# EAGLE board bottom_V3 Fillet v19 (EAGLE 9.7.0)
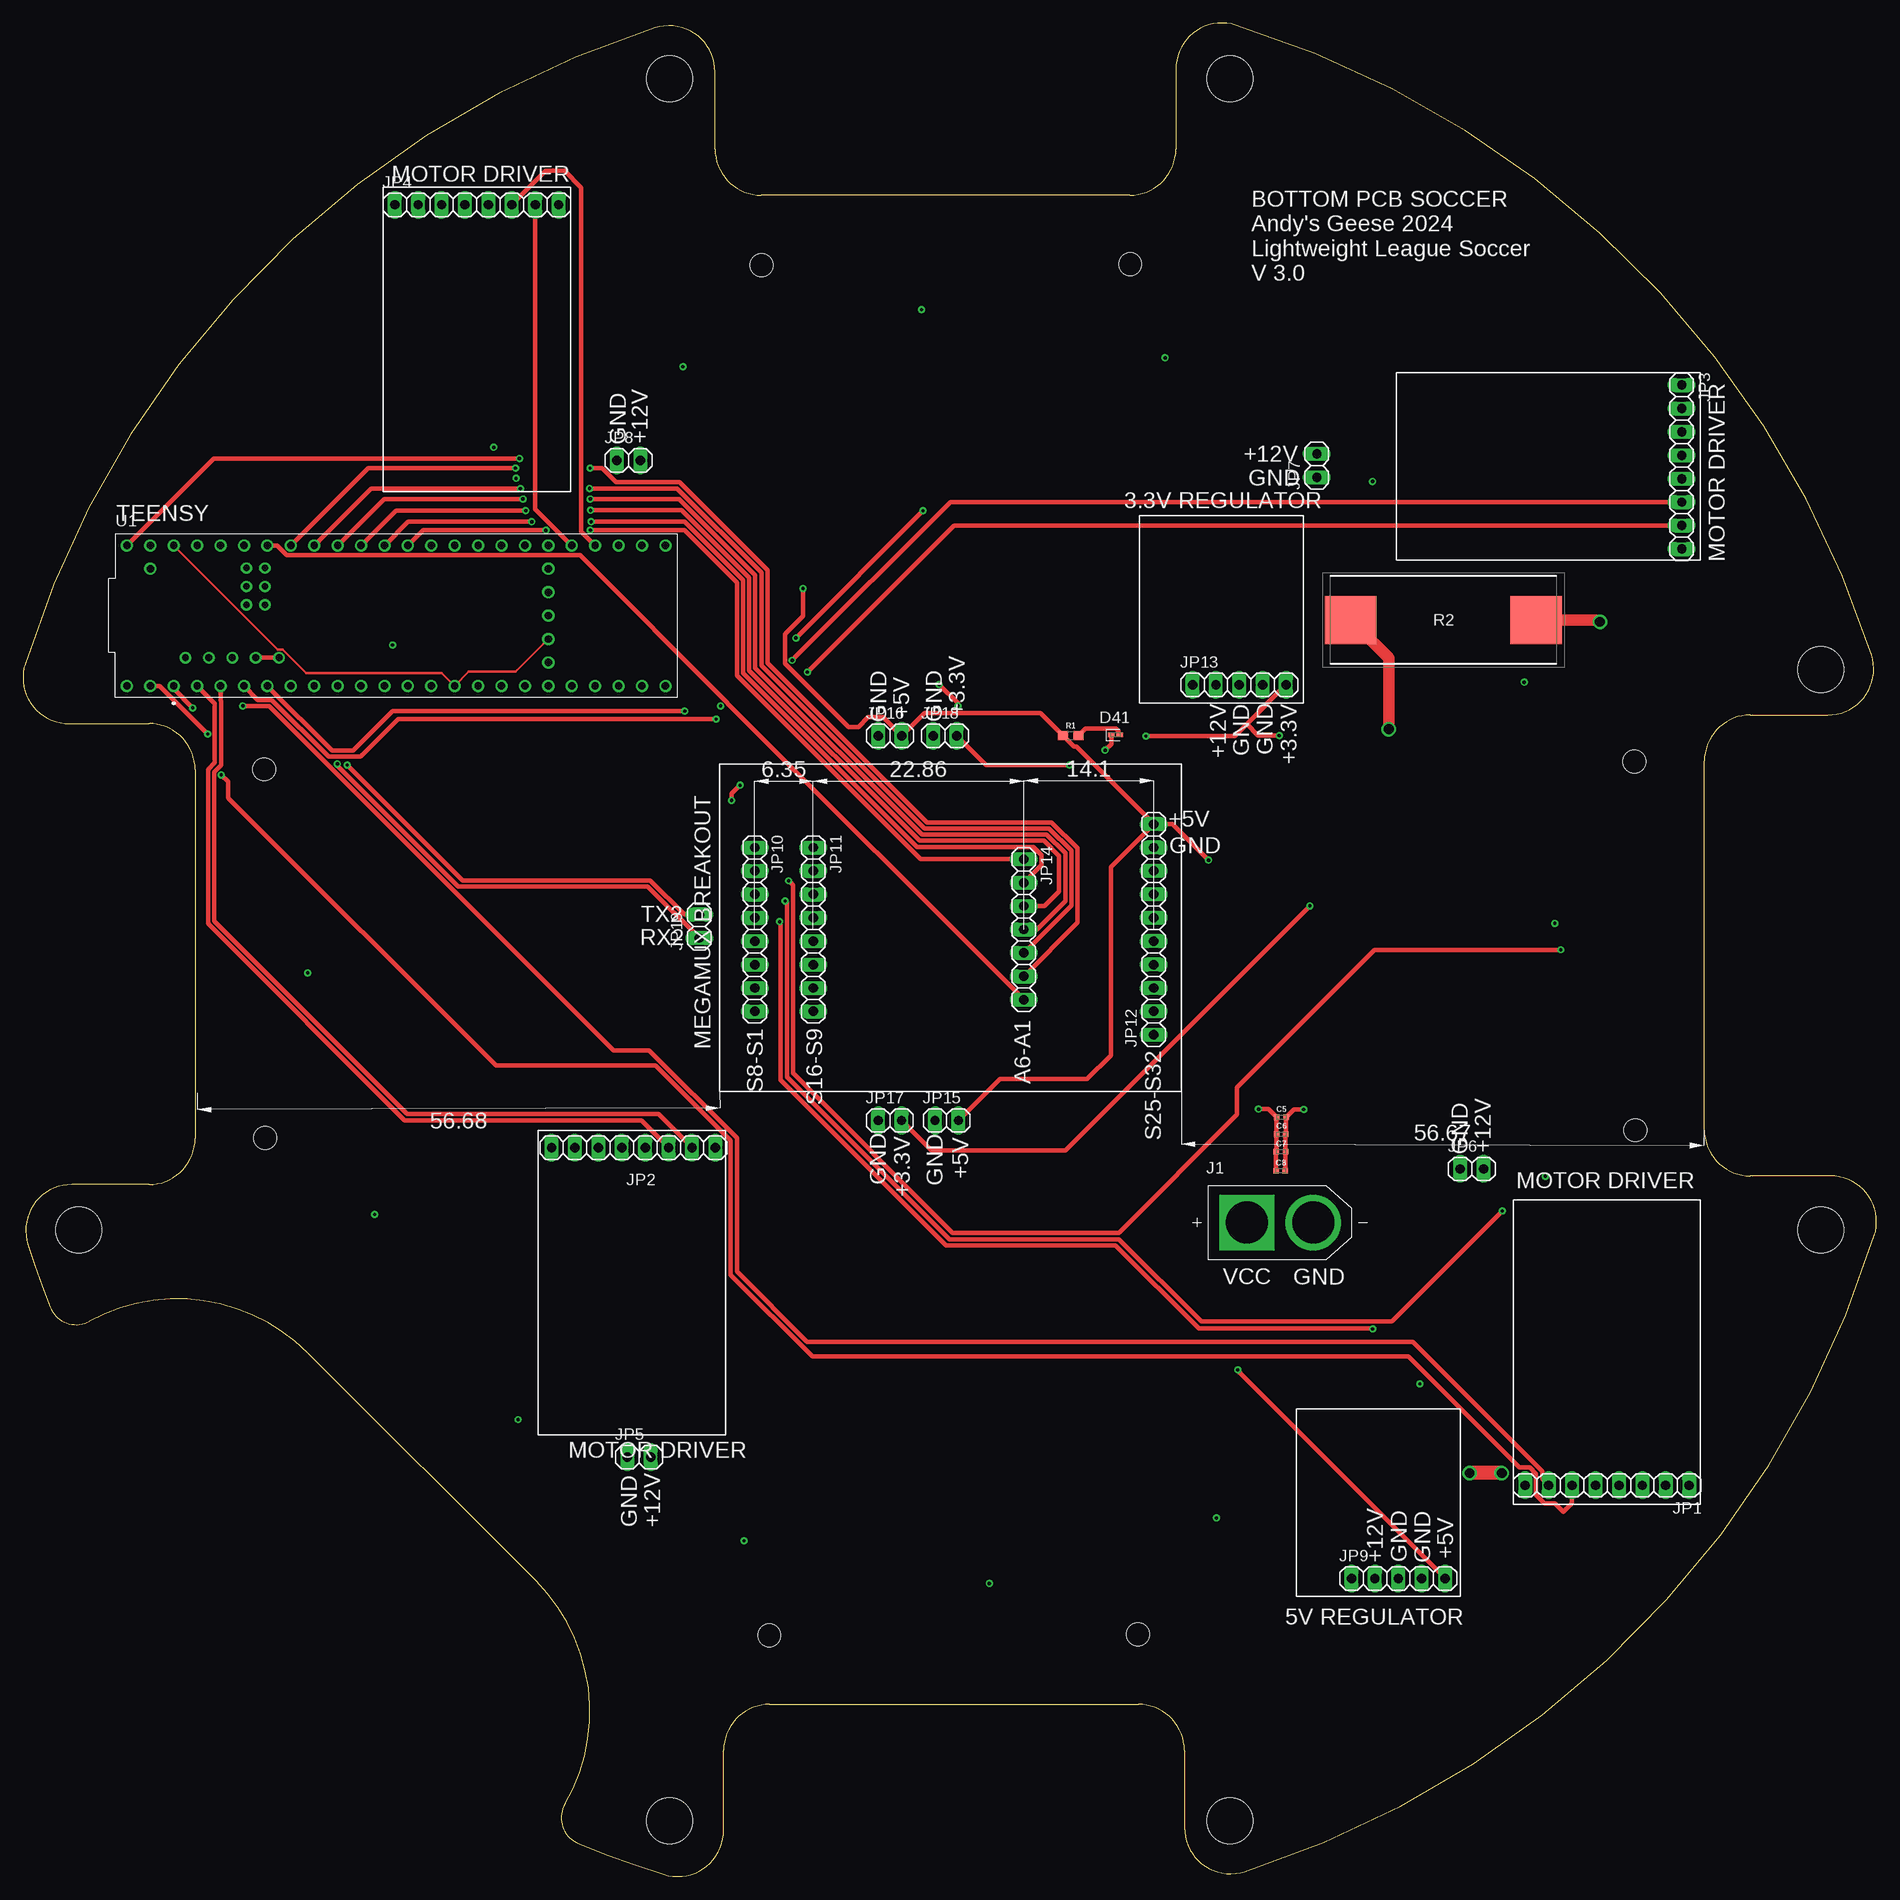
[diagram p0: board, top side]
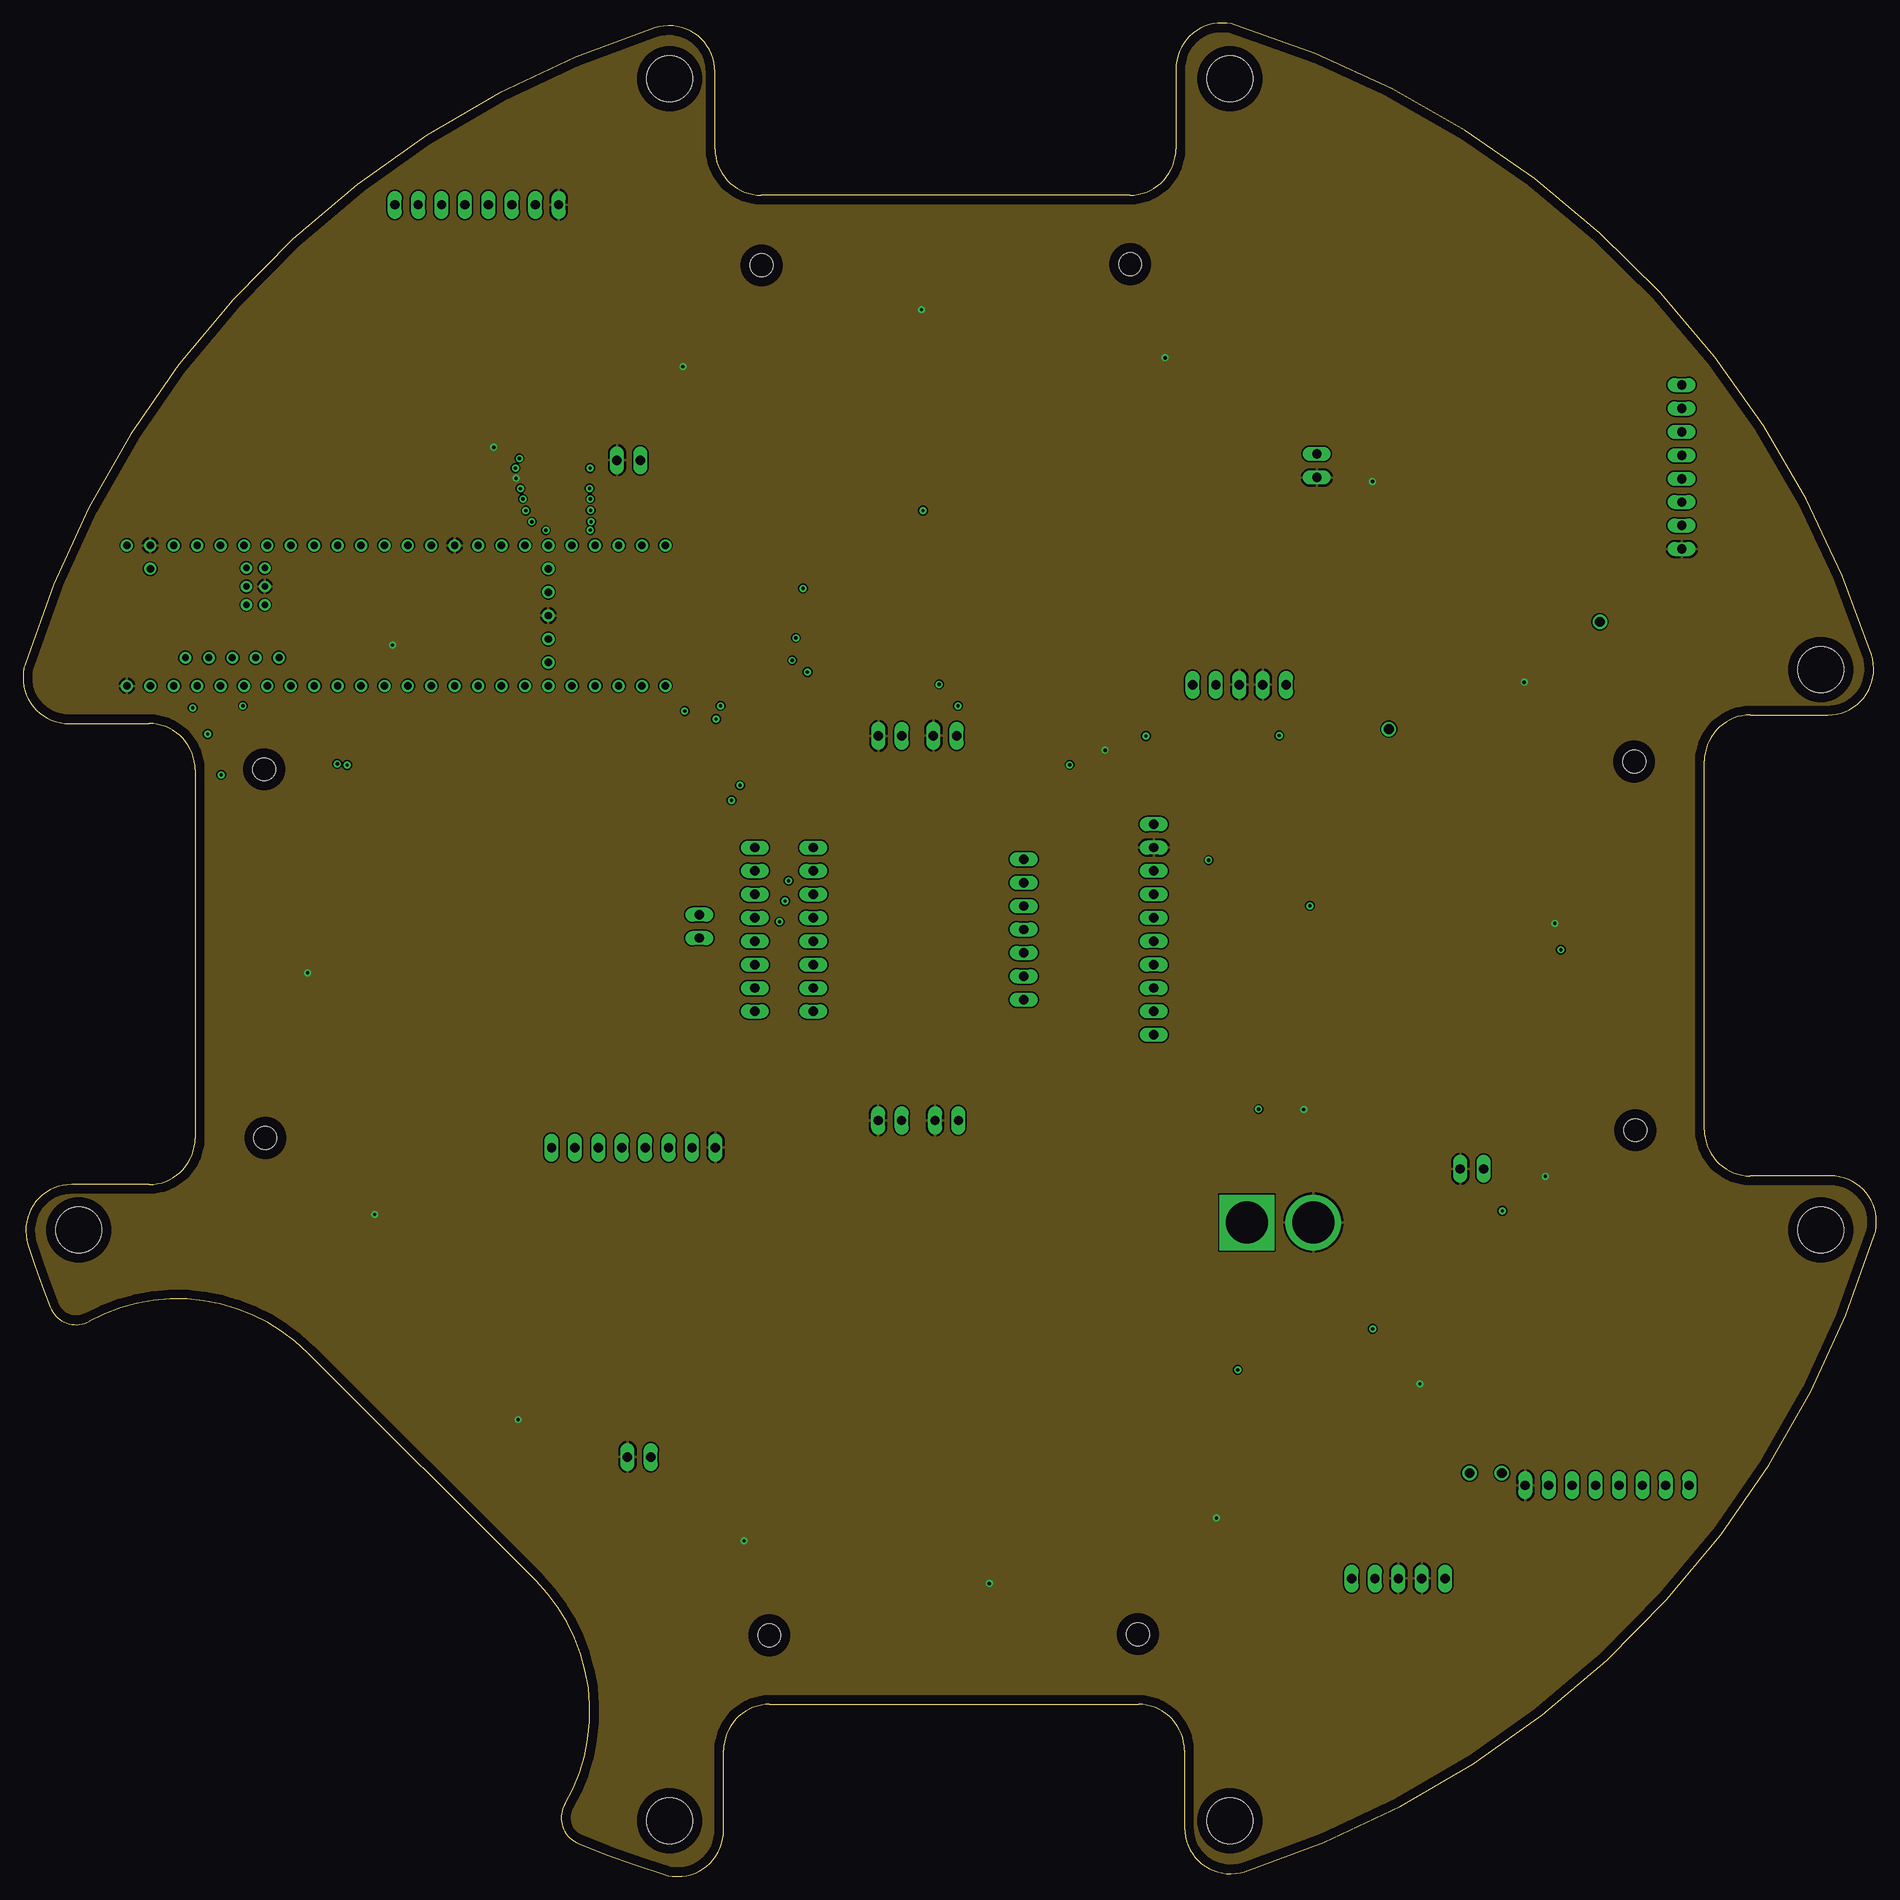
[diagram p1: board, inner layer Route2]
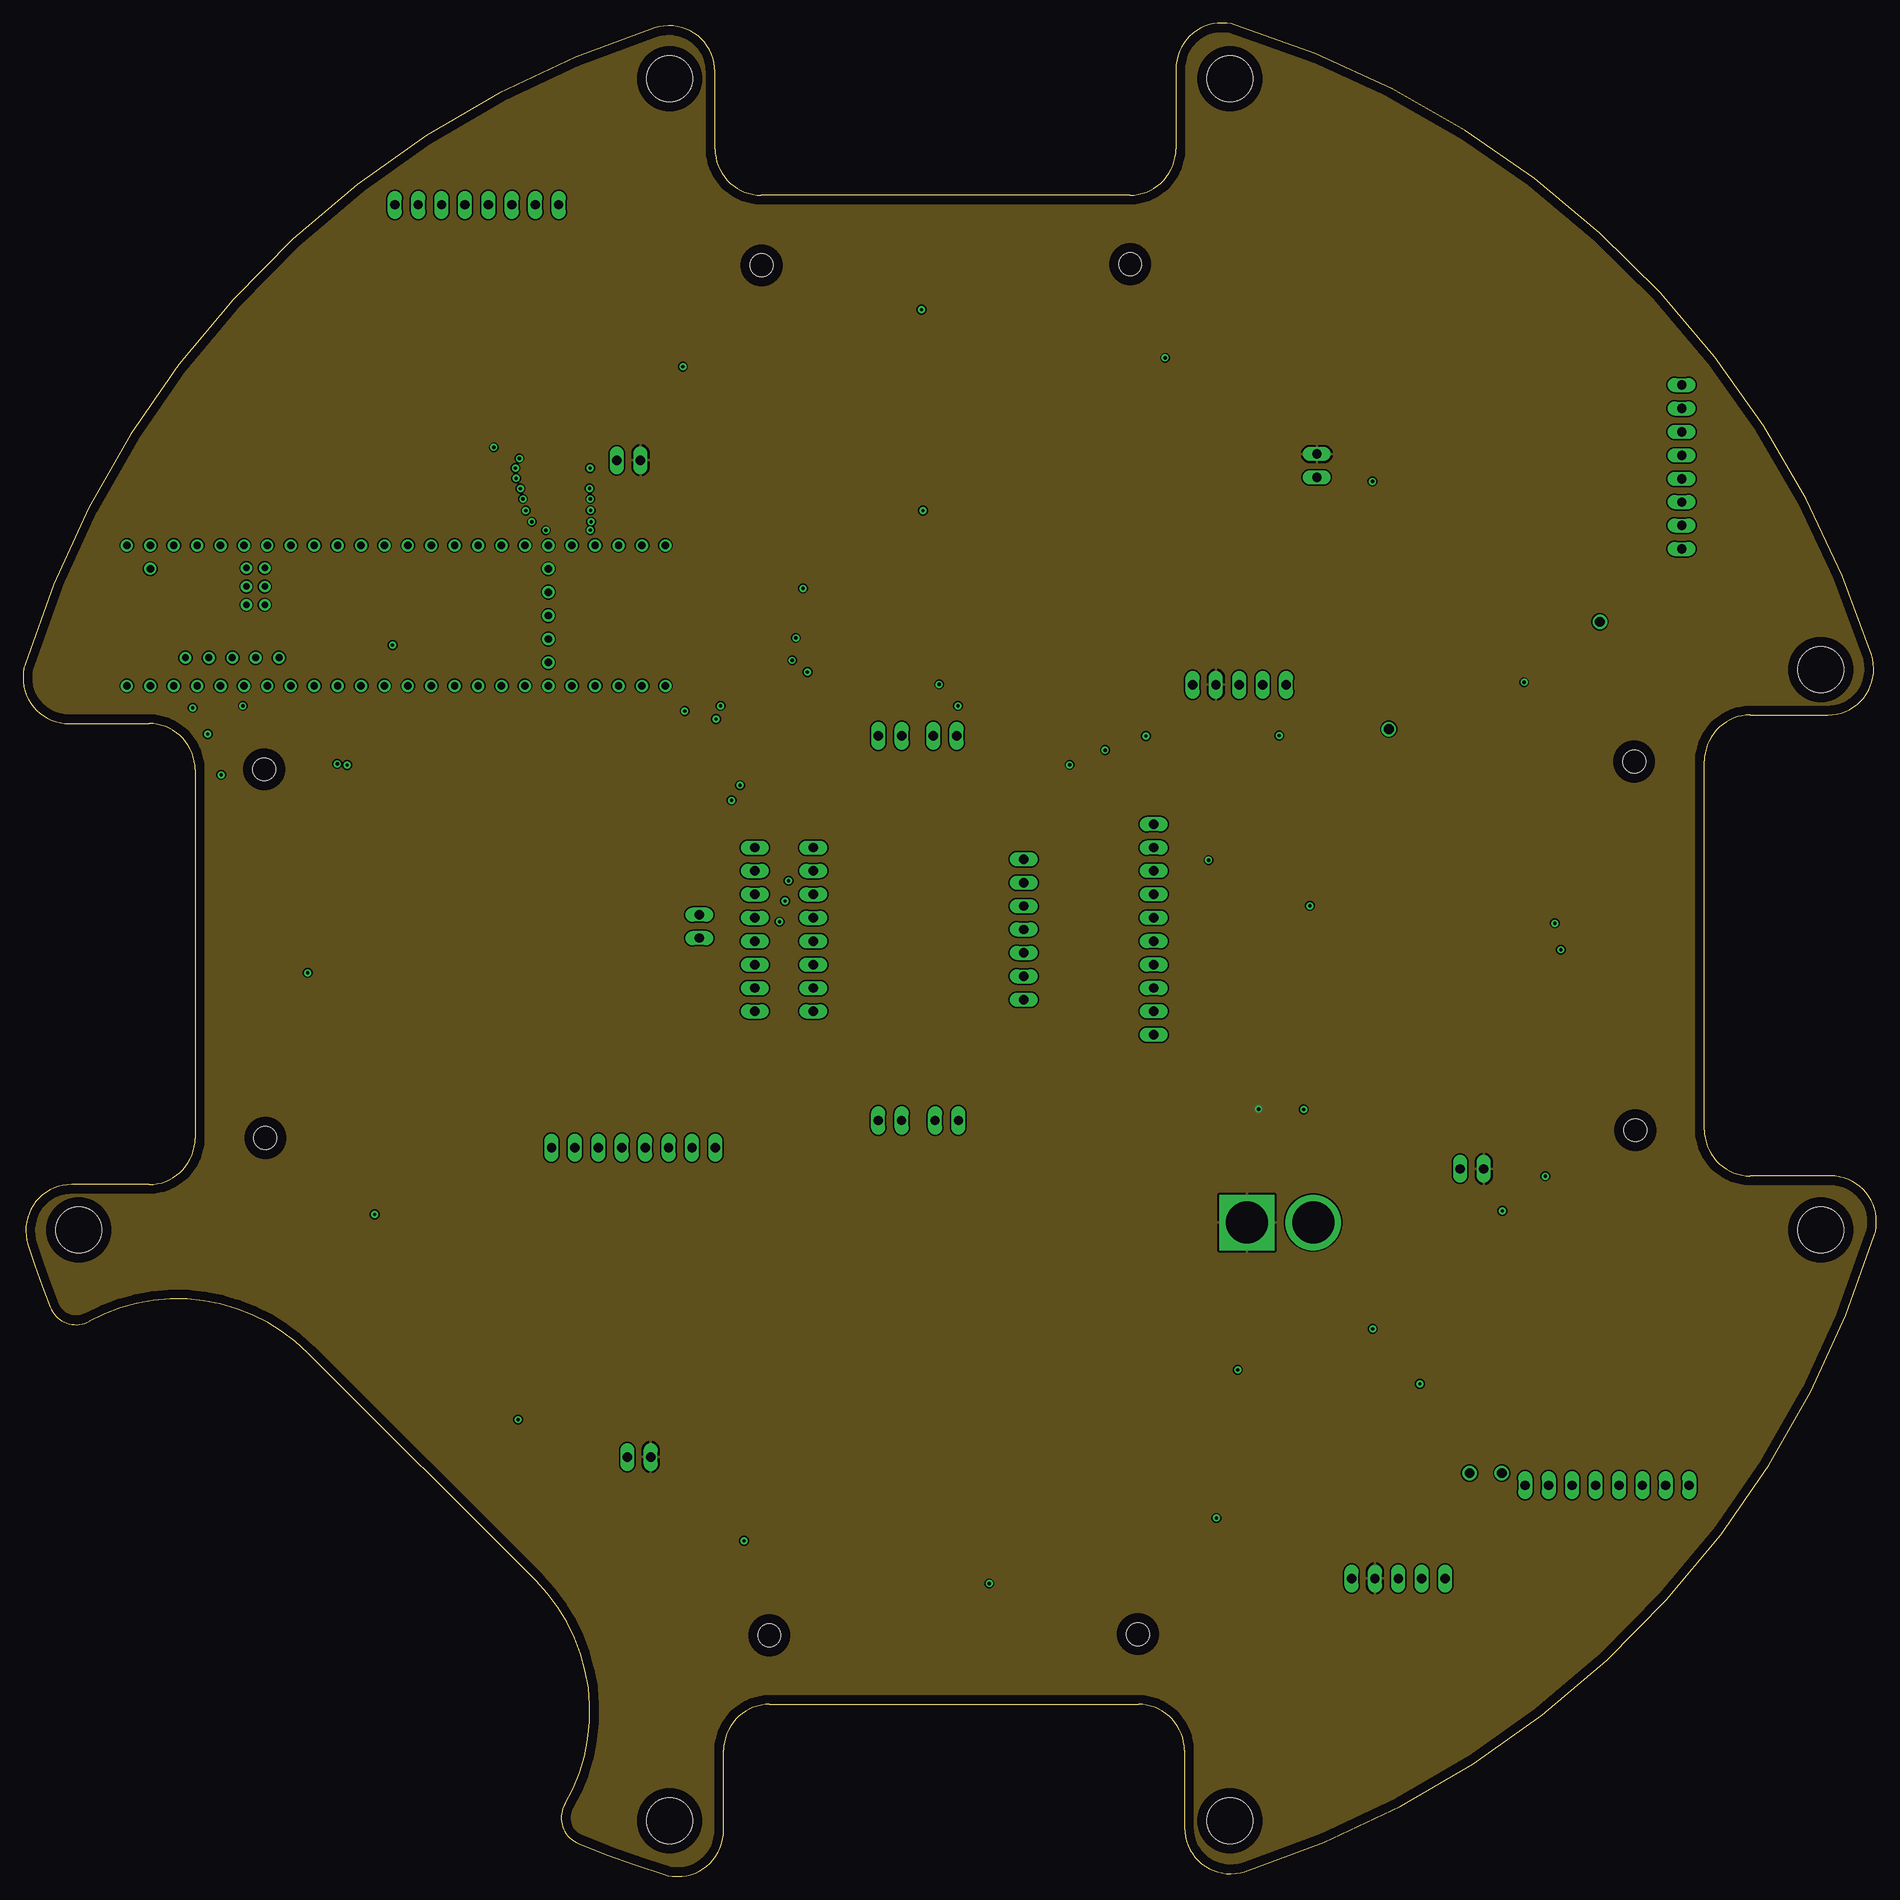
[diagram p2: board, inner layer Route15]
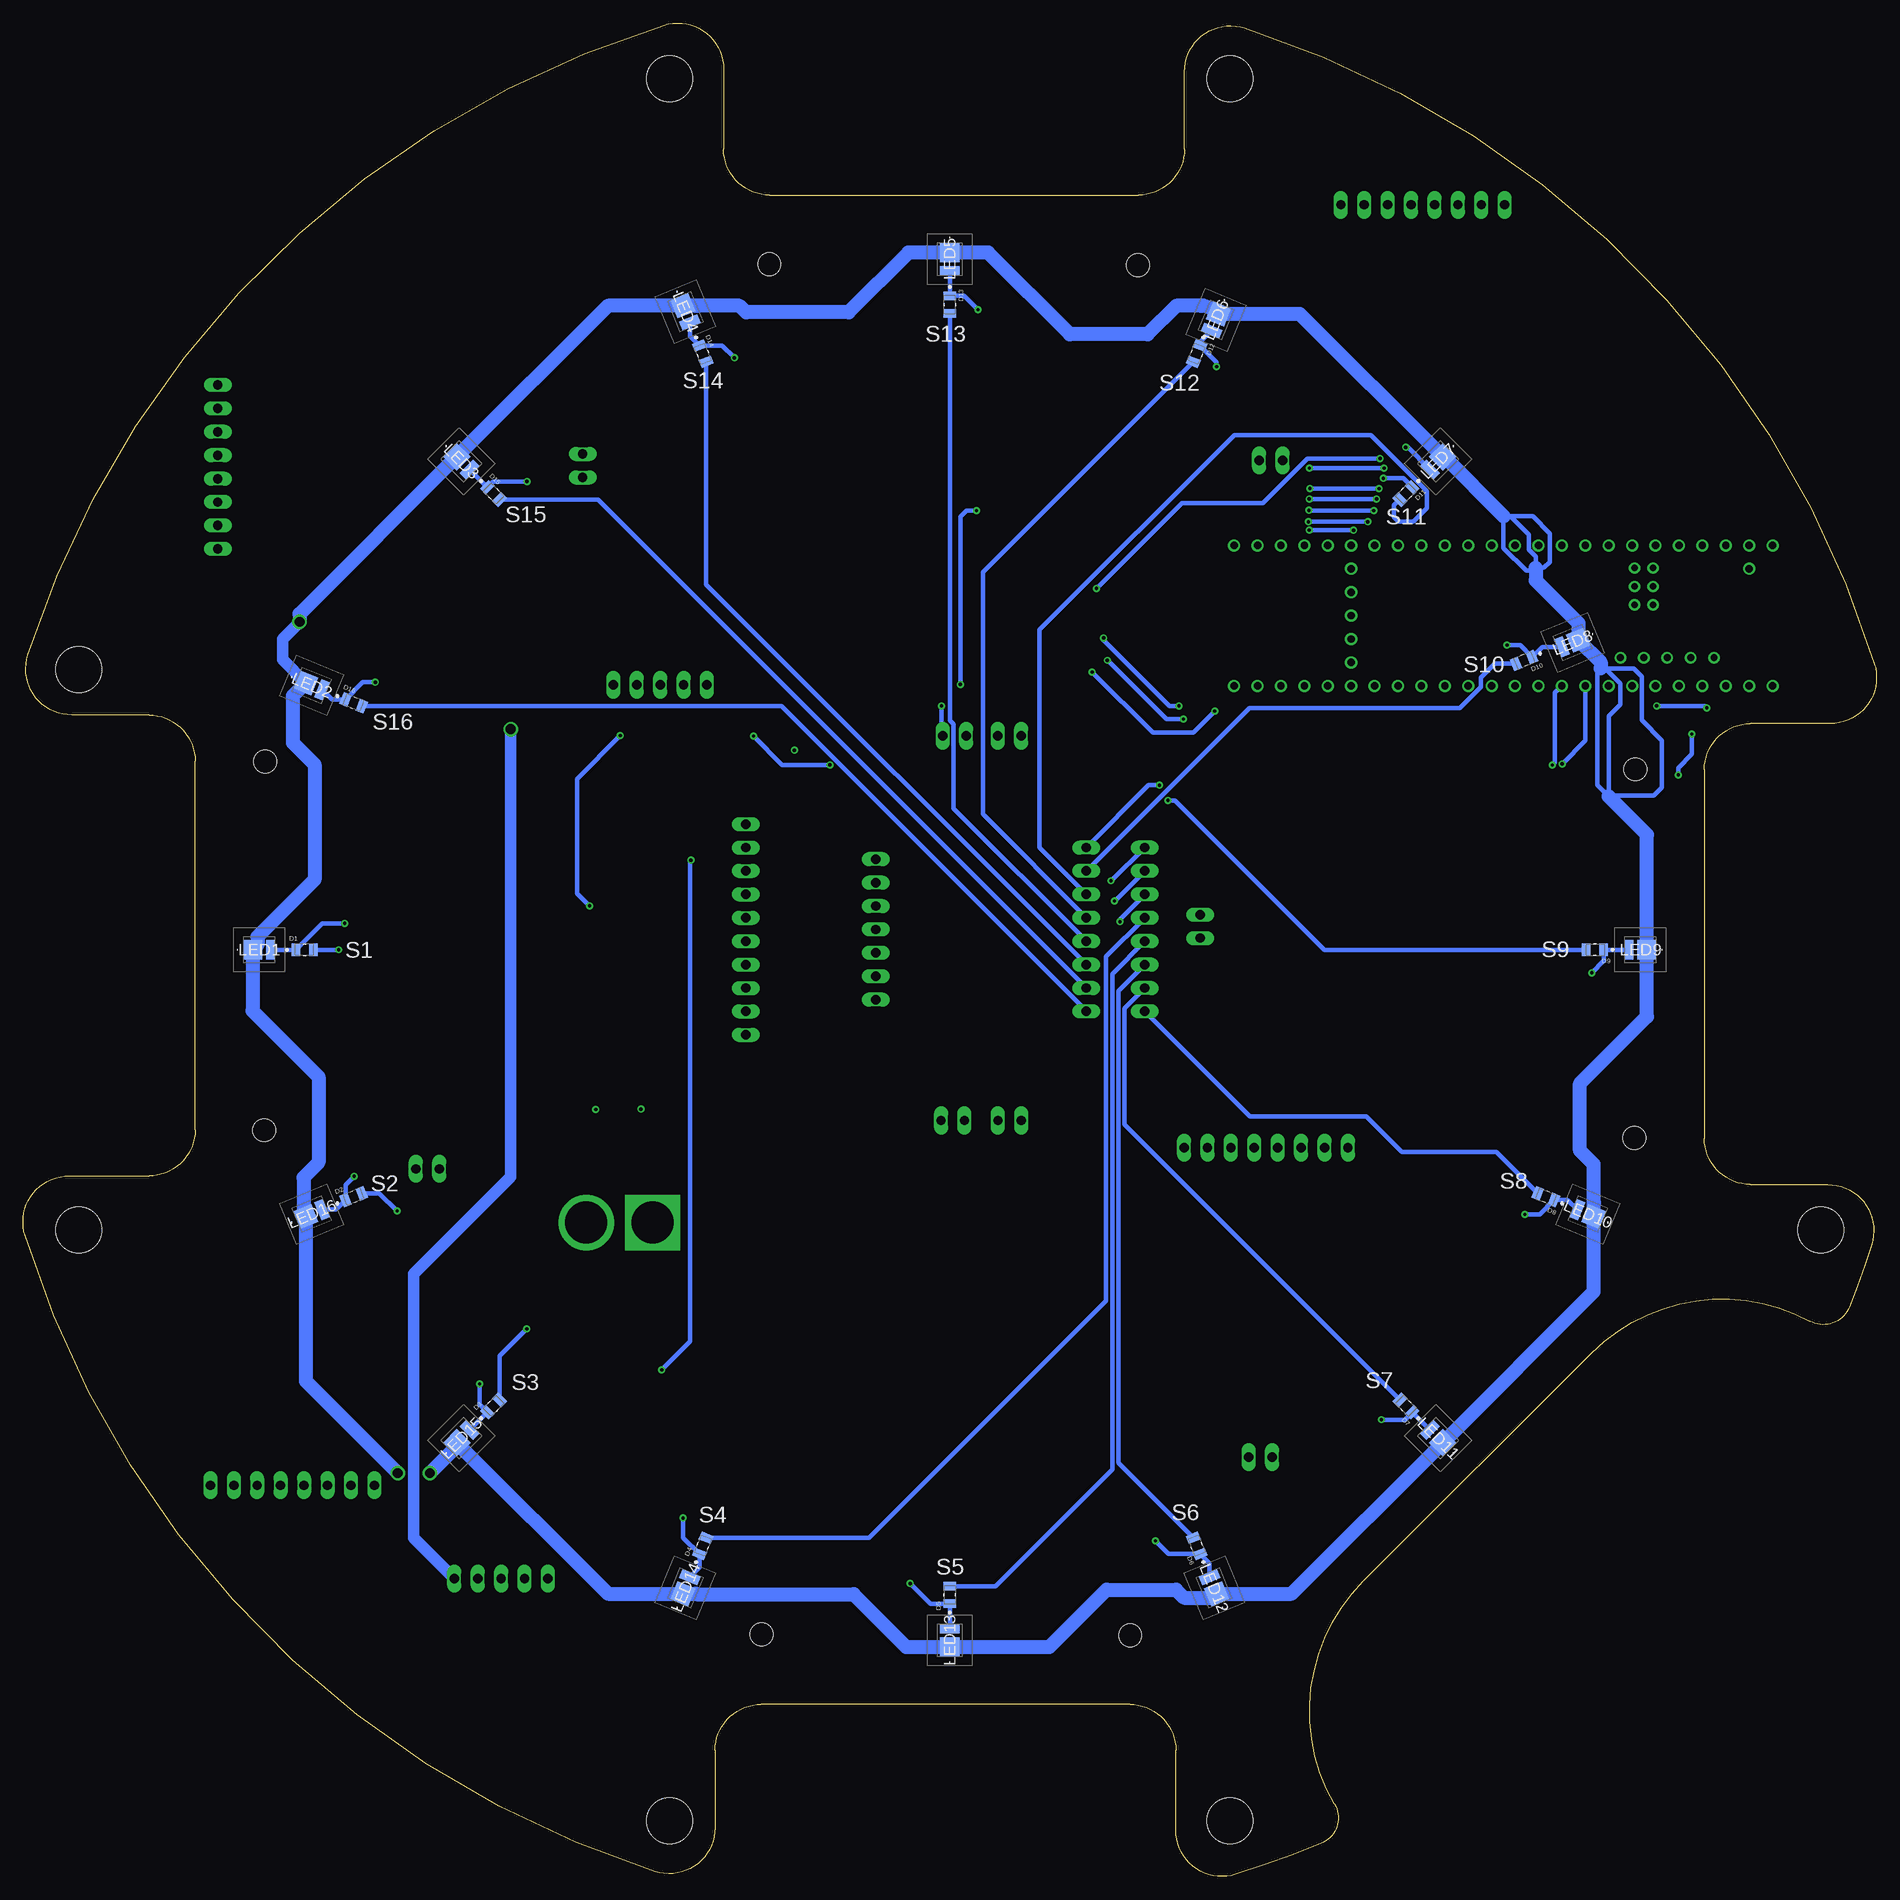
[diagram p3: board, bottom side, seen from below]

Size 201.08 x 201.08 mm. Coordinates in mm from the lower left corner, seen from the top.
Outline: 30.89,56.8 55.64,32.05 arc-75 58.79,7.86 arc98 60.23,3.58 arc5 69.53,0.22 arc107 76,5 76,13.67 arc-90 81,18.67 121,18.67 arc-90 126,13.67 126,5.29 arc108 132.53,0.53 arc55 200.85,69.53 arc107 196.08,76 187.4,76 arc-90 182.4,81 182.4,121 arc-90 187.4,126 195.79,126 arc108 200.55,132.53 arc55 131.55,200.85 arc107 125.07,196.08 125.07,187.4 arc-90 120.07,182.4 80.07,182.4 arc-90 75.07,187.4 75.07,195.79 arc108 68.55,200.55 arc55 0.22,131.55 arc107 5,125.07 13.67,125.07 arc-90 18.67,120.07 18.67,80.07 arc-90 13.67,75.07 5.29,75.07 arc108 0.53,68.55 arc4 2.97,61.75 arc97 7.19,60.22 arc-74 30.89,56.8
Copper layers (1+2*15+16): Top 0.035mm / dielectric 1.5mm / Route2 0.035mm / dielectric 0.15mm / Route15 0.035mm / dielectric 0.2mm / Bottom 0.035mm
Design rules "default *": minimum track width 6mil, minimum drill 0.35mm, track to track 6mil, track to pad 6mil, pad to pad 6mil, via to via 6mil, smd to smd 6mil, copper to edge 40mil, drill to drill 6mil, minimum pad ring 10mil, minimum via ring 8mil, stop-mask expansion 4mil, vias tented up to drill 0mil, thermal gap 10mil
Holes 2.5 mm at 80.12,174.79 80.96,26.17 174.79,120.96 26.17,120.12 120.12,174.9 120.96,26.29 174.9,80.96 26.29,80.12
Holes 5 mm at 195.02,70.16 130.92,6.06 6.06,70.16 70.16,6.06 195.02,130.92 130.92,195.02 70.16,195.02

## Footprints (pad centres in the part's own frame; a part is rotated, then mirrored left to right if it is on the bottom)
0402-TIGHT = smd 0.6 x 0.6: 1 -0.5,0; 2 0.5,0
DIOC2012X80N = smd 0.91 x 1.36: A 0.95,0; K -0.95,0
LEDC1005X25N_FLAT-G = smd 0.7 x 0.5: A 0.45,0; C -0.45,0
AMASS_XT60-M = drill 4.55 pad 6: N 3.6,0 | drill 4.55 pad 6 square: P -3.6,0
1X08 = drill 1.016 long: 1 -8.89,0; 2 -6.35,0; 3 -3.81,0; 4 -1.27,0; 5 1.27,0; 6 3.81,0; 7 6.35,0; 8 8.89,0
1X02 = drill 1.016 long: 1 -1.27,0; 2 1.27,0
1X05 = drill 1.016 long: 1 -5.08,0; 2 -2.54,0; 3 0,0; 4 2.54,0; 5 5.08,0
1X10 = drill 1.016 long: 1 -11.43,0; 2 -8.89,0; 3 -6.35,0; 4 -3.81,0; 5 -1.27,0; 6 1.27,0; 7 3.81,0; 8 6.35,0; 9 8.89,0; 10 11.43,0
1X07 = drill 1.016 long: 1 -7.62,0; 2 -5.08,0; 3 -2.54,0; 4 0,0; 5 2.54,0; 6 5.08,0; 7 7.62,0
150283HS73103 = smd 2.1 x 2.1: 1 -0.7,0 | smd 1 x 2.1: 2 1.25,0
0603 = smd 1.1 x 1: 1 -0.85,0; 2 0.85,0
RESM24595X990N = smd 5.6 x 5.2: 1 -10.05,0; 2 10.05,0
MODULE_DEV-16771 = drill 0.8: 0 -26.67,-7.62; 1 -24.13,-7.62; 2 -21.59,-7.62; 3 -19.05,-7.62; 3.3V_1 6.35,-7.62; 3.3V_2 -24.13,7.62; 3.3V_3 16.51,-2.54; 4 -16.51,-7.62; 5 -13.97,-7.62; 6 -11.43,-7.62; 7 -8.89,-7.62; 8 -6.35,-7.62; 9 -3.81,-7.62; 10 -1.27,-7.62; 11 1.27,-7.62; 12 3.81,-7.62; 13 3.81,7.62; 14 1.27,7.62; 15 -1.27,7.62; 16 -3.81,7.62; 17 -6.35,7.62; 18 -8.89,7.62; 19 -11.43,7.62; 20 -13.97,7.62; 21 -16.51,7.62; 22 -19.05,7.62; 23 -21.59,7.62; 24 8.89,-7.62; 25 11.43,-7.62; 26 13.97,-7.62; 27 16.51,-7.62; 28 19.05,-7.62; 29 21.59,-7.62; 30 24.13,-7.62; 31 26.67,-7.62; 32 29.21,-7.62; 33 29.21,7.62; 34 26.67,7.62; 35 24.13,7.62; 36 21.59,7.62; 37 19.05,7.62; 38 16.51,7.62; 39 13.97,7.62; 40 11.43,7.62; 41 8.89,7.62; GND1 -29.21,-7.62; GND2 6.35,7.62; GND3 -26.67,7.62; GND4 16.51,0; ON/OFF 16.51,5.08; PROGRAM 16.51,2.54; VBAT 16.51,-5.08; VIN -29.21,7.62; VUSB -26.67,5.08 | drill 0.75: 5V -22.86,-4.57; D+ -17.78,-4.57; D- -20.32,-4.57; USB_GND1 -15.24,-4.57; USB_GND2 -12.7,-4.57 | drill 0.7: GND5 -14.24,3.17; LED -16.24,3.17; R+ -16.24,5.17; R- -14.24,5.17; T+ -14.24,1.17; T- -16.24,1.17

## Placement (x,y rotation side)
C5  0.1uF  [0402-TIGHT]  136.52,82.36 0 top
C6  0.1uF  [0402-TIGHT]  136.5,80.54 0 top
C7  0.1uF  [0402-TIGHT]  136.47,78.62 0 top
C8  0.1uF  [0402-TIGHT]  136.45,76.55 0 top
D1  019-141-411-R  [DIOC2012X80N]  170.54,100.54 0 bottom
D2  019-141-411-R  [DIOC2012X80N]  165.21,73.75 22.5 bottom
D3  019-141-411-R  [DIOC2012X80N]  150.04,51.04 45 bottom
D4  019-141-411-R  [DIOC2012X80N]  127.33,35.87 67.5 bottom
D5  019-141-411-R  [DIOC2012X80N]  100.54,30.54 90 bottom
D6  019-141-411-R  [DIOC2012X80N]  73.75,35.87 112.5 bottom
D7  019-141-411-R  [DIOC2012X80N]  51.04,51.04 135 bottom
D8  019-141-411-R  [DIOC2012X80N]  35.87,73.75 157.5 bottom
D9  019-141-411-R  [DIOC2012X80N]  30.54,100.54 180 bottom
D10  019-141-411-R  [DIOC2012X80N]  38.24,131.93 202.5 bottom
D11  019-141-411-R  [DIOC2012X80N]  51.04,150.04 225 bottom
D12  019-141-411-R  [DIOC2012X80N]  73.75,165.21 247.5 bottom
D13  019-141-411-R  [DIOC2012X80N]  100.54,170.54 270 bottom
D14  019-141-411-R  [DIOC2012X80N]  127.33,165.21 292.5 bottom
D15  019-141-411-R  [DIOC2012X80N]  150.04,150.04 315 bottom
D16  019-141-411-R  [DIOC2012X80N]  165.21,127.33 337.5 bottom
D41  LED_GREEN  [LEDC1005X25N_FLAT-G]  118.51,123.85 0 top
J1  XT60-M  [AMASS_XT60-M]  136.37,70.94 0 top
JP1  PINHD-1X8  [1X08]  171.87,42.43 180 top
JP2  PINHD-1X8  [1X08]  66.23,79.07 0 top
JP3  PINHD-1X8  [1X08]  179.95,152.91 270 top
JP4  PINHD-1X8  [1X08]  49.22,181.36 0 top
JP5  PINHD-1X2  [1X02]  66.83,45.51 0 top
JP6  PINHD-1X2  [1X02]  157.19,76.76 0 top
JP7  PINHD-1X2  [1X02]  140.37,153.05 90 top
JP8  PINHD-1X2  [1X02]  65.7,153.64 0 top
JP9  PINHD-1X5  [1X05]  149.21,32.33 0 top
JP10  PINHD-1X8  [1X08]  79.37,102.74 270 top
JP11  PINHD-1X8  [1X08]  85.72,102.74 270 top
JP12  PINHD-1X10  [1X10]  122.67,102.74 90 top
JP13  PINHD-1X5  [1X05]  131.96,129.29 0 top
JP14  PINHD-1X7  [1X07]  108.58,102.74 270 top
JP15  PINHD-1X2  [1X02]  100.21,82.02 0 top
JP16  PINHD-1X2  [1X02]  94.06,123.74 0 top
JP17  PINHD-1X2  [1X02]  94.04,82.02 0 top
JP18  PINHD-1X2  [1X02]  100.02,123.75 0 top
JP19  PINHD-1X2  [1X02]  73.37,103.08 90 top
LED1  150283HS73103  [150283HS73103]  175.47,100.54 0 bottom
LED2  150283HS73103  [150283HS73103]  169.76,129.21 337.5 bottom
LED3  150283HS73103  [150283HS73103]  153.52,153.52 315 bottom
LED4  150283HS73103  [150283HS73103]  129.21,169.76 292.5 bottom
LED5  150283HS73103  [150283HS73103]  100.54,175.47 270 bottom
LED6  150283HS73103  [150283HS73103]  71.66,168.87 247.5 bottom
LED7  150283HS73103  [150283HS73103]  47.56,153.52 225 bottom
LED8  150283HS73103  [150283HS73103]  32.97,133.87 202.5 bottom
LED9  150283HS73103  [150283HS73103]  25.61,100.54 180 bottom
LED10  150283HS73103  [150283HS73103]  31.31,71.86 157.5 bottom
LED11  150283HS73103  [150283HS73103]  47.56,47.56 135 bottom
LED12  150283HS73103  [150283HS73103]  71.86,31.31 112.5 bottom
LED13  150283HS73103  [150283HS73103]  100.54,25.61 90 bottom
LED14  150283HS73103  [150283HS73103]  129.21,31.31 67.5 bottom
LED15  150283HS73103  [150283HS73103]  153.52,47.56 45 bottom
LED16  150283HS73103  [150283HS73103]  169.76,71.86 22.5 bottom
R1  1k  [0603]  113.66,123.77 0 top
R2  SMW71R5JT  [RESM24595X990N]  154.1,136.33 0 top
U1  DEV-16771  [MODULE_DEV-16771]  40.48,136.79 0 top

## Library data of the parts
C5-C8 = SparkFun-Capacitors; PROD_ID: CAP-12416
D1-D16 = 019-141-411-R; MANUFACTURER: Advanced Photonix; MAXIMUM_PACKAGE_HEIGHT: 0.8mm; PARTREV: Rev 5/7/2019; STANDARD: IPC 7351B
D41 = LED; CATEGORY: LED; COLOR: GREEN; DESCRIPTION: CHIP LED FLAT; SUB-CATEGORY: CHIP; TYPE: FLAT_TOP
J1 = XT60-M; AVAILABILITY: Not in stock; CHECK_PRICES: https://www.snapeda.com/parts/XT60-M/AMASS/view-part/?ref=eda; DESCRIPTION: Plug; DC supply; XT60; male; PIN: 2; for cable; soldered; 30A; 500V; MF: AMASS; MP: XT60-M; PACKAGE: Package; PRICE: None; SNAPEDA_LINK: https://www.snapeda.com/parts/XT60-M/AMASS/view-part/?ref=snap
JP1-JP4 JP10 JP11 = Connector; CATEGORY: Headers; DESCRIPTION: Header, Straight, 8 Position; MANUFACTURER: Generic; MPN: Generic; OPERATING_TEMPERATURE: Generic; PART_STATUS: Active; PITCH: 0.100" (2.54mm); ROHS_COMPLIANCE: Generic; SERIES: Generic; SUB-CATEGORY: Headers, Male Pins; TYPE: Board to Board or Cable, Unshrouded, Through Hole, Straight
JP5-JP8 JP15-JP19 = Connector; CATEGORY: Headers; DESCRIPTION: Header, Straight, 2 Position; MANUFACTURER: Generic; MPN: Generic; OPERATING_TEMPERATURE: Generic; PART_STATUS: Active; PITCH: 0.100" (2.54mm); ROHS_COMPLIANCE: Generic; SERIES: Generic; SUB-CATEGORY: Headers, Male Pins; TYPE: Board to Board or Cable, Unshrouded, Through Hole, Straight
JP9 JP13 = Connector; CATEGORY: Headers; DESCRIPTION: Header, Straight, 5 Position; MANUFACTURER: Generic; MPN: Generic; OPERATING_TEMPERATURE: Generic; PART_STATUS: Active; PITCH: 0.100" (2.54mm); ROHS_COMPLIANCE: Generic; SERIES: Generic; SUB-CATEGORY: Headers, Male Pins; TYPE: Board to Board or Cable, Unshrouded, Through Hole, Straight
JP12 = Connector; CATEGORY: Headers; DESCRIPTION: Header, Straight, 10 Position; MANUFACTURER: Generic; MPN: Generic; OPERATING_TEMPERATURE: Generic; PART_STATUS: Active; PITCH: 0.100" (2.54mm); ROHS_COMPLIANCE: Generic; SERIES: Generic; SUB-CATEGORY: Headers, Male Pins; TYPE: Board to Board or Cable, Unshrouded, Through Hole, Straight
JP14 = Connector; CATEGORY: Headers; DESCRIPTION: Header, Straight, 7 Position; MANUFACTURER: Generic; MPN: Generic; OPERATING_TEMPERATURE: Generic; PART_STATUS: Active; PITCH: 0.100" (2.54mm); ROHS_COMPLIANCE: Generic; SERIES: Generic; SUB-CATEGORY: Headers, Male Pins; TYPE: Board to Board or Cable, Unshrouded, Through Hole, Straight
LED1-LED16 = 150283HS73103; DESCRIPTION: Standard LEDs - SMD WL-SMTW Wtrclr TopVw Hrt 2.2V 150mA 660nm; HEIGHT: 0.85mm; MANUFACTURER_NAME: Wurth Elektronik; MANUFACTURER_PART_NUMBER: 150283HS73103; MOUSER_PART_NUMBER: 710-150283HS73103; MOUSER_PRICE-STOCK: https://www.mouser.co.uk/ProductDetail/Wurth-Elektronik/150283HS73103?qs=GedFDFLaBXH95OYexHSCsg%3D%3D
R1 = SparkFun-Resistors; PROD_ID: RES-07856
R2 = SMW71R5JT; DESCRIPTION: Configuration Features: Number of Resistors 1 | Dimensions: Product Height .378 INCH | Product Height 9.6 MM | Product Width 9.5 MM | Product Length .906 INCH | Product Width .374 INCH | Product Length 23 MM | Electrical Characteristics: Resistance Value 1.5 OHM | Passive Component Tolerance 5 PCT | Resistance Class Up to 1k | Power Rating 7 WATT | Packaging Features: Packaging Method Taped & Reeled | Product Type Features: Element Type Wire Wound | Resistor Type Power Resistor | Termination Features: Sur; HEIGHT: 9.9mm; MANUFACTURER_NAME: TE Connectivity; MANUFACTURER_PART_NUMBER: SMW71R5JT; MOUSER_PART_NUMBER: 279-SMW71R5JT; MOUSER_PRICE-STOCK: https://www.mouser.co.uk/ProductDetail/TE-Connectivity-Holsworthy/SMW71R5JT?qs=zW32dvEIR3v4pGMAHBLPRg%3D%3D
U1 = DEV-16771; AVAILABILITY: In Stock; CHECK_PRICES: https://www.snapeda.com/parts/DEV-16771/SparkFun+Electronics/view-part/?ref=eda; DESCRIPTION: RT1062 Teensy 4.1 series ARM® Cortex®-M7 MPU Embedded Evaluation Board; MF: SparkFun Electronics; MP: DEV-16771; PACKAGE: None; PRICE: None; PURCHASE-URL: https://www.snapeda.com/api/url_track_click_mouser/?unipart_id=4833875&manufacturer=SparkFun Electronics&part_name=DEV-16771&search_term=None; SNAPEDA_LINK: https://www.snapeda.com/parts/DEV-16771/SparkFun+Electronics/view-part/?ref=snap

## Nets
0: JP1.6 U1.0
1: JP1.7 U1.1
2: JP2.6 U1.2
3: JP2.7 U1.3
3.3V: U1.3.3V_1 U1.3.3V_2 U1.3.3V_3
4: JP3.6 U1.4
5: JP3.7 U1.5
5V: U1.5V
6: U1.6
36: JP4.6 U1.36
37: JP4.7 U1.37
+3.3V: JP13.5 JP17.2 JP18.2
+5V: JP9.5 JP12.10 JP15.2 JP16.2 R1.1 R2.1 U1.VIN
A0: JP14.1 U1.14
A1: JP14.2 U1.15
A2: JP14.3 U1.16
A3: JP14.4 U1.17
A4: JP14.5 U1.18
A5: JP14.6 U1.19
A6: JP14.7 U1.20
A7: U1.21
A8: U1.22
A9: U1.23
A10: U1.24
A11: U1.25
A12: U1.26
A13: U1.27
A14: U1.38
A15: U1.39
A16: U1.40
A17: U1.41
CRX3: U1.30
CS1: U1.10
CTX3: U1.31
GND: C5.2 C6.2 C7.2 C8.2 D1.K D2.K D3.K D4.K D5.K D6.K D7.K D8.K D9.K D10.K D11.K D12.K D13.K D14.K D15.K D16.K D41.C J1.N JP1.8 JP2.8 JP3.8 JP4.8 JP5.1 JP6.1 JP7.1 JP8.1 JP9.3 JP9.4 JP12.9 JP13.3 JP13.4 JP15.1 JP16.1 JP17.1 JP18.1 LED1.2 LED2.2 LED3.2 LED4.2 LED5.2 LED6.2 LED7.2 LED8.2 LED9.2 LED10.2 LED11.2 LED12.2 LED13.2 LED14.2 LED15.2 LED16.2 U1.GND1 U1.GND2 U1.GND3 U1.GND4 U1.GND5
LED: U1.LED
MCLK2: U1.33
MISO: U1.12
MOSI: U1.11
N$1: LED1.1 LED2.1 LED3.1 LED4.1 LED5.1 LED6.1 LED7.1 LED8.1 LED9.1 LED10.1 LED11.1 LED12.1 LED13.1 LED14.1 LED15.1 LED16.1 R2.2
N$33: D41.A R1.2
ON/OFF: U1.ON/OFF
OUT1B: U1.32
OUT1C: U1.9
PROGRAM: U1.PROGRAM
RX2: JP19.1 U1.7
RX7: U1.28
RX8: U1.34
S1: D1.A JP10.1
S2: D2.A JP10.2
S3: D3.A JP10.3
S4: D4.A JP10.4
S5: D5.A JP10.5
S6: D6.A JP10.6
S7: D7.A JP10.7
S8: D8.A JP10.8
S9: D9.A JP11.1
S10: D10.A JP11.2
S11: D11.A JP11.3
S12: D12.A JP11.4
S13: D13.A JP11.5
S14: D14.A JP11.6
S15: D15.A JP11.7
S16: D16.A JP11.8
S25: JP12.1
S26: JP12.2
S27: JP12.3
S28: JP12.4
S29: JP12.5
S30: JP12.6
S31: JP12.7
S32: JP12.8
SCK: U1.13
TX2: JP19.2 U1.8
TX7: U1.29
TX8: U1.35
USB_GND: U1.USB_GND1 U1.USB_GND2
VBAT: U1.VBAT
VCC: C5.1 C6.1 C7.1 C8.1 J1.P JP5.2 JP6.2 JP7.2 JP8.2 JP9.2 JP13.2
VUSB: U1.VUSB

## Tracks (layer width: path | path; a pad name or v marks a point on that pad's centre or on a via)
0  (via drill 0.35)
  Top 0.508: JP1.6 168.06,40.49 167.13,39.56 166.19,40.5 165.03,40.5 164.14,41.39 164.14,43.68 163.46,44.36 162.33,44.36 150.29,56.4 85.65,56.4 76.78,65.28 76.78,79.83 68.65,87.96 51.3,87.96 22.26,117 22.26,118.77 v21.51,119.52 | v20.03,123.94 14.81,129.17 U1.0
  Bottom 0.508: v20.03,123.94 20.03,121.74 21.51,120.27 v21.51,119.52
1  (via drill 0.35)
  Top 0.508: v18.42,126.78 16.35,128.85 U1.1 | JP1.7 164.8,43.14 164.8,43.95 150.77,57.98 85.07,57.98 77.44,65.62 77.44,80.1 67.91,89.63 64.07,89.63 26.7,126.99 v23.85,126.99
  Bottom 0.508: v23.85,126.99 18.63,126.99 v18.42,126.78
2
  Top 0.508: JP2.6 67.08,82.03 41.4,82.03 20.07,103.37 20.07,120.12 20.82,120.87 20.82,127.24 U1.2
3
  Top 0.508: U1.3 21.43,127.56 21.48,127.51 21.48,120.59 20.73,119.84 20.73,103.64 41.65,82.72 68.93,82.72 JP2.7
3.3V
  Top 0.254: U1.3.3V_2 27.63,133.12 28.15,133.12 30.71,130.57 45.43,130.57 U1.3.3V_1 48.37,130.71 53.45,130.71 U1.3.3V_3
4  (via drill 0.35)
  Top 0.508: v75.18,125.56 40.71,125.56 36.64,121.49 33.13,121.49 26.97,127.65 25.48,127.65 U1.4 | JP3.6 100.62,149.1 v83.45,131.94
  Bottom 0.508: v75.18,125.56 77.04,125.56 83.41,131.94 v83.45,131.94
5  (via drill 0.35)
  Top 0.508: JP3.7 100.97,146.56 v85.09,130.69 v85.09,130.67 | v71.79,126.42 40.1,126.42 35.83,122.15 33.52,122.15 U1.5
  Bottom 0.508: v85.09,130.67 78.51,124.09 74.12,124.09 v71.79,126.42
36
  Top 0.508: U1.36 60.56,145.92 60.56,183.23 58.74,185.04 56.71,185.04 JP4.6
37
  Top 0.508: U1.37 55.57,148.36 JP4.7
+3.3V  (via drill 0.35)
  Top 0.508: JP13.5 132.75,125 | 132.75,125 131.46,123.71 v121.82,123.71 | v113.55,120.6 104.45,120.6 JP18.2 | 132.75,125 133.98,123.77 v136.28,123.77 | v139.62,105.3 v139.62,105.29 113.09,78.76 98.56,78.76 JP17.2 | v83.84,134.37 v97.64,148.17 | v99.39,129.33 101.44,127.29 v101.44,127
  Bottom 0.508: v121.82,123.71 118.71,120.6 v113.55,120.6 | v136.28,123.77 140.98,119.07 140.98,106.66 v139.62,105.3 | v75.67,127 76.69,127 83.84,134.15 v83.84,134.37 | v97.64,148.17 98.74,148.17 99.39,147.51 v99.39,129.33 | v101.44,127 101.44,123.9 JP18.2
+5V  (via drill 0.35, 1.05)
  Top 0.508: JP9.5 131.78,54.84 v131.78,54.95 | JP15.2 105.97,86.51 115.45,86.51 118.04,89.09 118.04,109.53 JP12.10 | v128.62,110.26 124.71,114.17 JP12.10 | JP12.10 114.26,122.58 114,122.58 R1.1 110.37,126.21 97.79,126.21 JP16.2 93.31,125.77 91.69,125.77 90.64,124.71 89.57,124.71 82.67,131.61 82.67,134.81 84.62,136.76 v84.62,139.74 | U1.VIN 20.7,153.84 v53.85,153.84
  Top 1.27: v148.17,124.48 148.17,132.2 R2.1
  Bottom 0.508: v131.78,54.95 128.7,58.04 128.7,110.18 v128.62,110.26 | v53.85,153.84 61.75,153.84 66.58,149.01 75.35,149.01 v84.62,139.74
  Bottom 1.27: JP9.5 158.71,36.75 158.71,65.37 148.17,75.9 v148.17,124.48
A0  (via drill 0.35)
  Top 0.508: U1.14 43.39,146.04 v56.73,146.04 | v61.54,146.06 71.76,146.06 77.46,140.36 77.46,130.28 97.38,110.36 JP14.1
  Bottom 0.508: v56.73,146.04 61.44,146.04 61.46,146.06 v61.54,146.06
A1  (via drill 0.35)
  Top 0.508: U1.15 41.77,146.97 v55.19,146.97 | JP14.2 110.51,109.75 110.51,110.84 109.65,111.71 96.97,111.71 78.12,130.55 78.12,140.63 71.79,146.97 v61.62,146.97
  Bottom 0.508: v55.19,146.97 v61.62,146.97
A2  (via drill 0.35)
  Top 0.508: U1.16 40.46,148.2 v54.54,148.2 | JP14.3 110.81,105.28 112.41,106.87 112.41,110.73 110.78,112.37 97.24,112.37 78.78,130.83 78.78,140.9 71.47,148.22 v61.58,148.22
  Bottom 0.508: v54.54,148.2 61.56,148.2 v61.58,148.22
A3  (via drill 0.35)
  Top 0.508: U1.17 39.17,149.45 v54.23,149.45 | JP14.4 109.98,102.74 113.07,105.83 113.07,111.01 111.05,113.03 97.52,113.03 79.44,131.1 79.44,141.18 71.17,149.45 v61.54,149.45
  Bottom 0.508: v61.54,149.45 v54.23,149.45
A4  (via drill 0.35)
  Top 0.508: U1.18 37.74,150.56 v53.96,150.56 | JP14.5 113.73,105.35 113.73,111.28 111.32,113.69 97.79,113.69 80.1,131.37 80.1,141.45 70.97,150.58 v61.47,150.58
  Bottom 0.508: v53.96,150.56 61.44,150.56 v61.47,150.58
A5  (via drill 0.35)
  Top 0.508: U1.19 37.43,152.79 v53.42,152.79 | v61.51,152.8 62.79,152.8 64.32,151.27 71.22,151.27 80.76,141.72 80.76,131.65 98.06,114.35 111.6,114.35 114.39,111.55 114.39,103.47 JP14.6
  Bottom 0.508: v53.42,152.79 v61.51,152.79 v61.51,152.8
A6
  Top 0.508: U1.20 27.55,144.41 28.61,143.35 60.43,143.35 76.45,127.32 76.45,127.25 JP14.7
GND  (via drill 0.35)
  Top 0.508: C8.2 136.95,78.6 C7.2 136.97,80.51 C6.2 137,82.35 C5.2 137.86,83.21 v138.95,83.21 | D41.C 118.06,122.85 v117.4,122.19
  Bottom 0.508: v97.47,169.99 98.97,171.49 D13.K LED5.2 | v123.9,164.75 125.24,166.09 D14.K 128.73,167.13 LED4.2 | v146.41,151.34 150.07,151.34 D15.K LED3.2 | v162.86,129.56 164.22,129.56 D16.K 167.57,127.69 LED2.2 | v166.2,103.4 168.62,103.4 D1.K LED1.2 | v151.53,53.44 151.53,51.19 D3.K LED15.2 | v129.46,38.89 129.46,36.76 D4.K 127.69,33.51 LED14.2 | v104.83,31.78 102.64,29.59 D5.K LED13.2 | v78.24,36.4 76.83,34.99 D6.K 72.34,33.94 LED12.2 | v53.71,49.56 51.18,49.56 D7.K LED11.2 | v38.14,71.83 36.55,71.83 D8.K 33.51,73.39 LED10.2 | v30.89,98.04 29.59,99.35 D9.K LED9.2 | v40.08,133.59 38.65,133.59 D10.K 36.27,133.39 LED8.2 | D11.K 51.35,151.69 v53.48,151.69 | v165.14,75.96 166.09,75.02 D2.K 167.13,72.34 LED16.2 | v71.59,163.79 71.59,164.29 D12.K 73.39,166.46 LED6.2 | LED7.2 50.85,155.04 v51.07,155.04
  pour Route2: 29.16,-14.07 209.2,-14.07 231.55,8.27 231.55,143.45 170.73,204.27 18.68,204.27 18.67,204.26 18.65,204.27 18.63,204.27 18.63,204.27 18.6,204.27 8.52,204.27 -24.66,171.08 -24.66,39.75
N$1  (via drill 1.05)
  Top 1.27: R2.2 170.84,136.33 v171.07,136.1
  Top 1.524: v160.43,43.77 v156.93,43.77
  Bottom 0.508: 29.05,117.16 30.27,118.39 30.27,130.71 29.93,131.06 29.44,131.06 | 29.05,117.16 28.95,117.26 24.16,117.26 23.27,118.16 23.27,123.25 25.45,125.43 25.45,130.18 26.32,131.06 29.44,131.06 | 39.74,147.57 37.73,145.56 37.73,143.97 36.95,143.19 36.95,141.98 | 39.74,147.57 40.45,147.57 40.45,144.1 38,141.65 37.28,141.65 36.95,141.98 | 39.74,147.57 37.3,147.57 35.43,145.7 35.43,142.62 36.07,141.98 36.95,141.98 | 29.44,131.06 27.79,129.41 27.79,127.16 29.05,125.9 29.05,117.16
  Bottom 1.27: v171.07,136.1 172.93,134.24 172.93,132 LED2.1
  Bottom 1.524: LED2.1 171.82,128.07 171.82,123.01 169.46,120.65 169.46,108.14 175.63,101.97 175.63,101.07 LED1.1 176.17,93.9 169.01,86.74 169.01,77.47 170.65,75.83 170.65,71.84 LED16.1 170.41,53.75 v160.43,43.77 | v156.93,43.77 154.02,46.68 LED15.1 137.62,30.67 LED14.1 128.08,30.67 128.03,30.61 110.98,30.61 105.27,24.91 LED13.1 89.73,24.91 83.52,31.11 75.99,31.11 75.12,30.24 72.02,30.24 LED12.1 63.45,30.67 LED11.1 30.67,63.45 LED10.1 30.67,73 30.61,73.12 30.67,73.25 30.67,77.25 32.16,78.75 32.16,86.03 24.91,93.29 LED9.1 24.91,113.02 29.05,117.16 | 40.45,147.57 46.9,154.02 LED7.1 62.56,169.52 LED6.1 71.78,169.91 73.12,170.46 73.25,170.41 75.96,170.41 79.07,167.3 87.51,167.3 96.39,176.17 LED5.1 105.02,176.17 111.49,169.69 122.63,169.69 123.35,170.41 127.83,170.41 127.96,170.46 128.08,170.41 LED4.1 137.62,170.41 LED3.1 171.07,136.96 v171.07,136.1 | 36.95,141.98 36.95,140.6 32.32,135.97 LED8.1 29.93,131.74 29.93,131.06
N$33
  Top 0.508: D41.A 118.82,124 118.82,124.27 118.58,124.51 115.26,124.51 R1.2
RX2  (via drill 0.35)
  Top 0.508: JP19.1 67.78,107.4 47.22,107.4 34.09,120.53 v34.09,120.71
  Bottom 0.508: v34.09,120.71 31.59,123.21 U1.7
S1  (via drill 0.35)
  Top 0.508: v83.04,108.02 83.53,107.54 83.53,87.15 100.84,69.83 118.87,69.83 131.69,82.65 131.69,85.61 146.61,100.54 v166.84,100.54
  Bottom 0.508: JP10.1 82.98,108.02 v83.04,108.02 | v166.84,100.54 D1.A
S2  (via drill 0.35)
  Top 0.508: v160.5,72.19 148.5,60.19 127.85,60.19 118.92,69.12 100.5,69.12 82.87,86.76 82.87,105.65 v82.68,105.84
  Bottom 0.508: JP10.2 82.62,105.84 v82.68,105.84 | v160.5,72.19 162.43,74.11 D2.A
S3  (via drill 0.35)
  Top 0.508: v146.42,59.41 146.39,59.44 127.55,59.44 118.53,68.46 100.15,68.46 82.21,86.4 82.21,103.46 v82.08,103.58
  Bottom 0.508: v146.42,59.41 149.36,56.47 D3.A | JP10.3 82.08,103.83 v82.08,103.58
S4
  Bottom 0.508: JP10.4 83.58,99.8 83.58,62.45 109.28,36.74 D4.A
S5
  Bottom 0.508: JP10.5 82.91,97.93 82.91,44.16 95.59,31.49 D5.A
S6
  Bottom 0.508: JP10.6 82.25,96.05 82.25,44.88 D6.A
S7
  Bottom 0.508: D7.A 81.59,81.59 81.59,94.17 JP10.7
S8
  Bottom 0.508: D8.A 41.24,78.61 51.49,78.61 55.35,82.47 67.99,82.47 JP10.8
S9  (via drill 0.35)
  Top 0.508: v77.78,118.38 76.88,117.49 v76.88,116.74
  Bottom 0.508: JP11.1 78.96,118.38 v77.78,118.38 | D9.A 59.9,100.54 76.1,116.74 v76.88,116.74
S10
  Bottom 0.508: JP11.2 68.04,126.77 45.19,126.77 42.93,129.03 42.93,130.07 41.43,131.57 D10.A
S11
  Bottom 0.508: JP11.3 90.78,111.61 90.78,135.25 69.63,156.4 54.84,156.4 48.76,150.32 48.76,148.48 50.26,146.98 51.87,146.98 52.37,147.47 52.37,148.8 51.81,149.36 D11.A
S12
  Bottom 0.508: JP11.4 96.95,115.24 96.95,141.5 D12.A
S13
  Bottom 0.508: D13.A 100.54,125.41 100.13,125 100.13,115.87 JP11.5
S14
  Bottom 0.508: JP11.6 126.96,140.17 D14.A
S15
  Bottom 0.508: JP11.7 138.7,149.36 D15.A
S16
  Bottom 0.508: JP11.8 85.72,93.88 118.8,126.96 D16.A
TX2  (via drill 0.35)
  Top 0.508: JP19.2 71.77,104.35 68.05,108.07 47.67,108.07 v35.15,120.58
  Bottom 0.508: U1.8 34.88,128.42 34.88,120.86 v35.15,120.58
USB_GND
  Top 0.508: U1.USB_GND1 U1.USB_GND2
VCC  (via drill 0.35)
  Top 0.508: C8.1 135.95,78.6 C7.1 135.97,80.51 C6.1 136,82.35 C5.1 135.13,83.25 v134.05,83.25
  pour Route15: 6,210.85 -41,180.29 -41,41.52 28.41,-27.89 215.65,-27.89 237.67,-5.86 237.67,150.1 176.92,210.85

## Text on the board
tPlace: MOTOR DRIVER | BOTTOM PCB SOCCER / Andy's Geese 2024 / Lightweight League Soccer / V 3.0 | MOTOR DRIVER | GND | +12V | +12V | GND | 3.3V REGULATOR | TEENSY | +12V | GND | GND | +3.3V | GND | +5V | GND | +3.3V | +5V | GND | TX2 | RX2 | S8-S1 | S16-S9 | MEGAMUX BREAKOUT | A6-A1 | GND | S25-S32 | +12V | GND | +5V | GND | MOTOR DRIVER | +3.3V | VCC | GND | MOTOR DRIVER | GND | +12V | GND | GND | +5V | +12V | 5V REGULATOR
bPlace: S13 | S12 | S14 | S11 | S15 | S10 | S16 | S9 | S1 | S8 | S2 | S7 | S3 | S6 | S4 | S5